# EAGLE board nanoled (EAGLE 7.6.0)
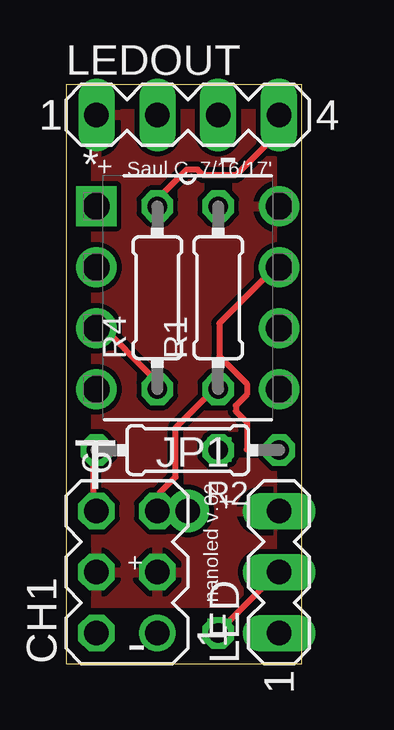
[diagram p0: board, top side]
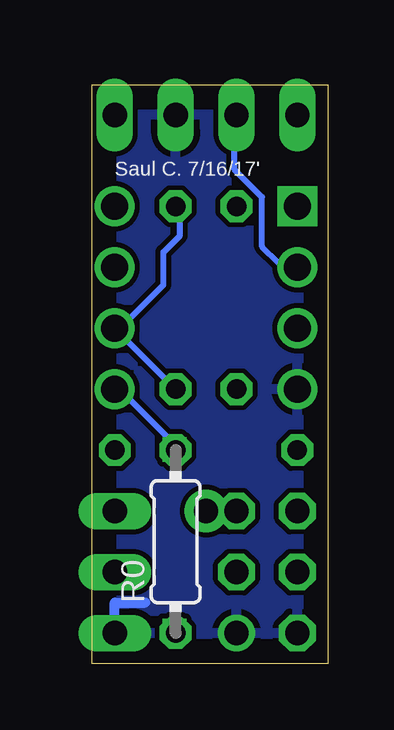
[diagram p1: board, bottom side, seen from below]

Size 9.83 x 24.12 mm. Coordinates in mm from the lower left corner, seen from the top.
Outline: 0,0 9.83,0 9.83,24.12 0,24.12 0,0
Copper layers (1*16): Top 0.035mm / dielectric 1.5mm / Bottom 0.035mm
Design rules "default": minimum track width 10mil, minimum drill 24mil, track to track 8mil, track to pad 8mil, pad to pad 8mil, via to via 8mil, smd to smd 8mil, copper to edge 40mil, drill to drill 8mil, minimum pad ring 10mil, minimum via ring 8mil, stop-mask expansion 4mil, vias tented up to drill 0mil, thermal gap 10mil

## Footprints (pad centres in the part's own frame; a part is rotated, then mirrored left to right if it is on the bottom)
MA03-2 = drill 1.016: 1 -2.54,-1.27 | drill 1.016 octagon: 2 -2.54,1.27; 3 0,-1.27; 4 0,1.27; 5 2.54,-1.27; 6 2.54,1.27
1X01-CLEANBIG = drill 1.016 pad 1.778: 1 0,0
MA03-1 = drill 1.016 long: 1 -2.54,0; 2 0,0; 3 2.54,0
MA04-1 = drill 1.016 long: 1 -3.81,0; 2 -1.27,0; 3 1.27,0; 4 3.81,0
0204/7 = drill 0.813 octagon: 1 -3.81,0; 2 3.81,0
DIP254P762X533-8 = drill 1.118 square: 1 -7.62,7.62 | drill 1.118: 2 -7.62,5.08; 3 -7.62,2.54; 4 -7.62,0; 5 0,0; 6 0,2.54; 7 0,5.08; 8 0,7.62

## Placement (x,y rotation side)
CH1  [MA03-2]  2.54,3.81 90 top
JP1  [1X01-CLEANBIG]  5.08,6.35 0 top
LED  [MA03-1]  8.89,3.81 90 top
LEDOUT  [MA04-1]  5.08,22.86 0 top
R0  220  [0204/7]  6.35,5.08 90 bottom
R1  10k  [0204/7]  6.35,15.24 90 top
R2  220  [0204/7]  5.08,8.89 180 top
R4  [0204/7]  3.81,15.24 90 top
T  ATTINY85-20PU  [DIP254P762X533-8]  8.89,11.43 0 top

## Library data of the parts
CH1 LED LEDOUT = con-lstb; OC_FARNELL: unknown; OC_NEWARK: unknown
JP1 = adafruit
R0 R1 R2 R4 = resistor
T = Atmel_By_element14_Batch_1-00; MPN: ATTINY85-20PU; OC_FARNELL: 1455162; OC_NEWARK: 58M3796; PACKAGE: PDIP-8; SUPPLIER: Atmel

## Nets
4OUT: LEDOUT.4 R4.2
GND: CH1.1 CH1.2 LED.1 LEDOUT.3 T.4
N$1: LED.2 R0.1
N$4: CH1.6 R2.2
P0: R0.2 T.5
P1: CH1.5 JP1.1 R1.1 R1.2 T.6
P2: R2.1 T.7
P3: LEDOUT.2 T.2
P4: R4.1 T.3
RST: T.1
VCC: CH1.3 CH1.4 LED.3 LEDOUT.1 T.8

## Tracks (layer width: path | path; a pad name or v marks a point on that pad's centre or on a via)
4OUT
  Top 0.254: R4.2 3.89,19.2 3.89,19.43 5.03,20.57 5.49,20.57 5.71,20.34 7.09,20.34 8.69,21.95 8.69,22.86 LEDOUT.4
GND
  Bottom 0.406: LED.1 8.89,2.54 7.62,2.54
  pour Bottom: 0,24.13 0,0 10.16,0 10.16,24.13
N$1  (via drill 0.6)
  Top 0.254: v6.4,1.37 8.69,3.66 LED.2
  Bottom 0.254: v6.4,1.37 R0.1
N$4
  Top 0.254: R2.2 1.14,8.69 1.14,6.4 CH1.6
P0  (via drill 0.6)
  Top 0.254: v6.4,8.91 R0.2
  Bottom 0.254: v6.4,8.91 6.4,9.14 8.69,11.43 T.5
P1
  Top 0.254: R1.1 6.17,11.43 4.57,9.83 4.57,7.77 3.89,7.09 3.89,6.4 CH1.5 JP1.1
  Bottom 0.254: R1.2 6.17,18.97 6.17,17.83 6.86,17.14 6.86,15.77 8.69,13.95 T.6 8.57,13.97 8.57,13.65 R1.1
P2
  Top 0.254: R2.1 7.54,8.91 7.54,10.06 7.09,10.52 7.09,10.74 7.54,11.2 7.54,11.66 6.4,12.8 6.4,14.17 8.69,16.46 T.7
P3
  Bottom 0.254: LEDOUT.2 3.89,22.86 3.89,20.57 2.74,19.43 2.74,17.37 2.06,16.69 1.37,16.69 T.2
P4
  Top 0.254: R4.1 3.66,11.43 3.66,11.89 1.37,14.17 T.3
VCC
  pour Top: 0,26.67 0,2.54 10.16,2.54 10.16,26.67

## Text on the board
tPlace: + | Saul C. 7/16/17' | - | + | + | nanoled v.02 | -
bPlace: Saul C. 7/16/17'